# EAGLE board ltc3783-boost-driver-test-mk-1.0.0 (EAGLE 6.6.0)
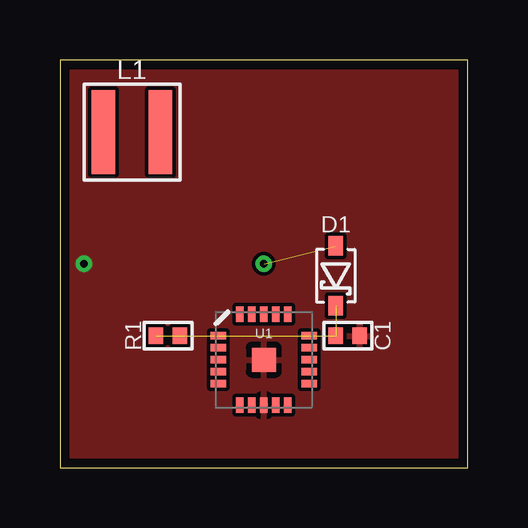
[diagram p0: board, top side]
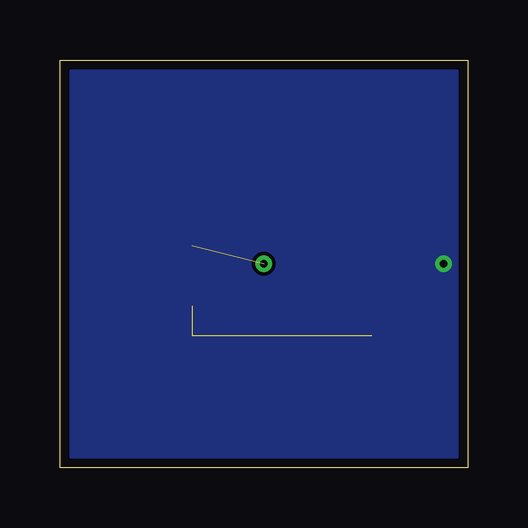
[diagram p1: board, bottom side, seen from below]

Size 17 x 17 mm. Coordinates in mm from the lower left corner, seen from the top.
Outline: 0,0 17,0 17,17 0,17 0,0
Copper layers (1*16): Top 0.0356mm / dielectric 1.5011mm / Bottom 0.0356mm
Design rules "LaenPCBOrder_2": minimum track width 6mil, minimum drill 13mil, track to track 6mil, track to pad 6mil, pad to pad 6mil, via to via 6mil, smd to smd 6mil, copper to edge 15mil, drill to drill 6mil, minimum pad ring 7mil, minimum via ring 7mil, stop-mask expansion 3mil, vias tented up to drill 20mil, thermal gap 10mil

## Footprints (pad centres in the part's own frame; a part is rotated, then mirrored left to right if it is on the bottom)
1X01_NOSILK_NOSTOP = drill 0.33: P$1 0,0
C0402 = smd 0.6 x 0.7: 1 -0.5,0; 2 0.5,0
SOD323-SCHOTTKY = smd 0.8 x 0.6: A -1.25,0; C 1.25,0
XFL4020 = smd 0.98 x 3.5: P$1 -1.185,0; P$2 1.185,0
R0402 = smd 0.6 x 0.7: 1 -0.5,0; 2 0.5,0
QFN20 = smd 1 x 1: 0 0,0 | smd 0.65 x 0.3: 1 -1.9,1; 2 -1.9,0.5; 3 -1.9,0; 4 -1.9,-0.5; 5 -1.9,-1; 11 1.9,-1; 12 1.9,-0.5; 13 1.9,0; 14 1.9,0.5; 15 1.9,1 | smd 0.3 x 0.65: 6 -1,-1.9; 7 -0.5,-1.9; 8 0,-1.9; 9 0.5,-1.9; 10 1,-1.9; 16 1,1.9; 17 0.5,1.9; 18 0,1.9; 19 -0.5,1.9; 20 -1,1.9

## Placement (x,y rotation side)
+  M01NOT-A-VIA-NOPE  [1X01_NOSILK_NOSTOP]  8.5,8.5 0 top
-  M01NOT-A-VIA-NOPE  [1X01_NOSILK_NOSTOP]  1,8.5 0 top
C1  1uF  [C0402]  12,5.5 0 top
D1  [SOD323-SCHOTTKY]  11.5,8 270 top
FRAME1  FRAME-LETTERNO_PACKAGE  [DUMMY]  0,0 0 top
L1  [XFL4020]  3,14 0 top
R1  10K  [R0402]  4.5,5.5 180 top
U1  Tiny25  [QFN20]  8.5,4.5 0 top

## Library data of the parts
+ - C1 D1 L1 R1 U1 = a_parts
FRAME1 = a_parts; DESIGNER: Nobody; VERSION: v01

## Nets
GND: -.P$1 C1.2 U1.0 U1.8
N$1: R1.2 U1.1
VBAT: +.P$1 D1.A
VCC: C1.1 D1.C R1.1 U1.15

## Tracks (layer width: path | path; a pad name or v marks a point on that pad's centre or on a via)
GND
  pour Bottom: 0,0 17,0 17,17 0,17
  pour Top: 0,0 17,0 17,17 0,17
N$1  (1 unrouted)
VBAT  (1 unrouted)
VCC  (3 unrouted)